# EAGLE board Charge (EAGLE 8.4.1)
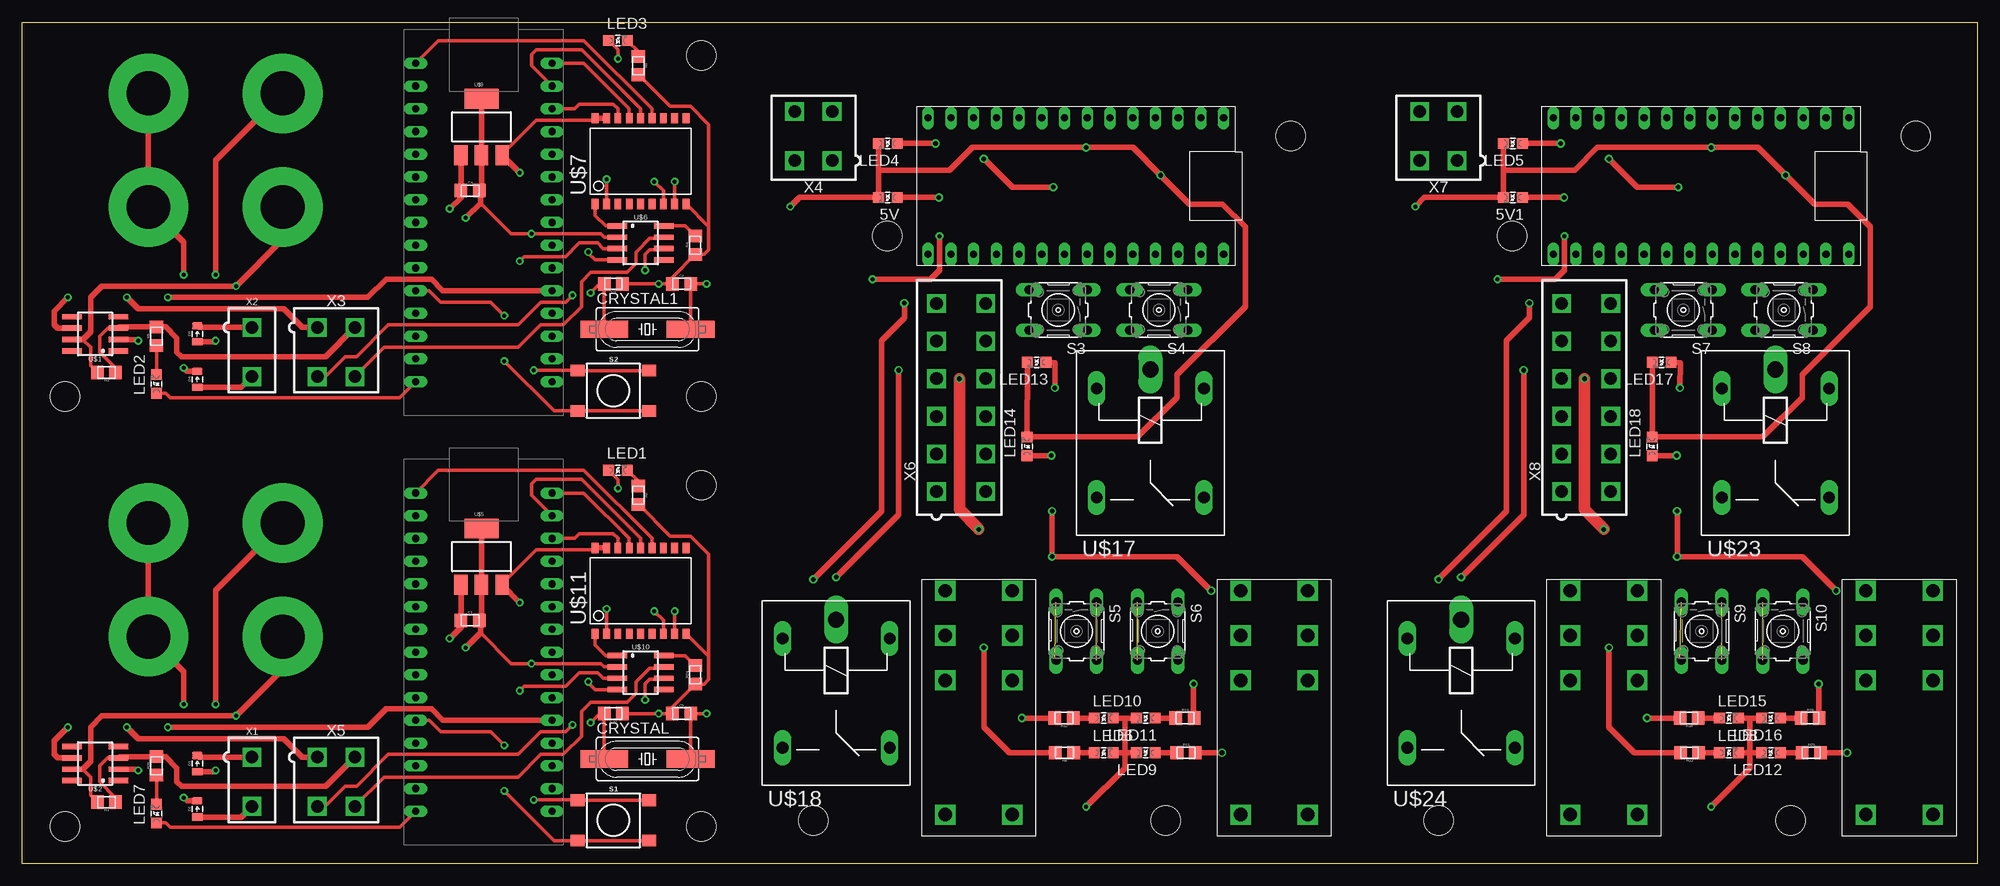
[diagram p0: board, top side]
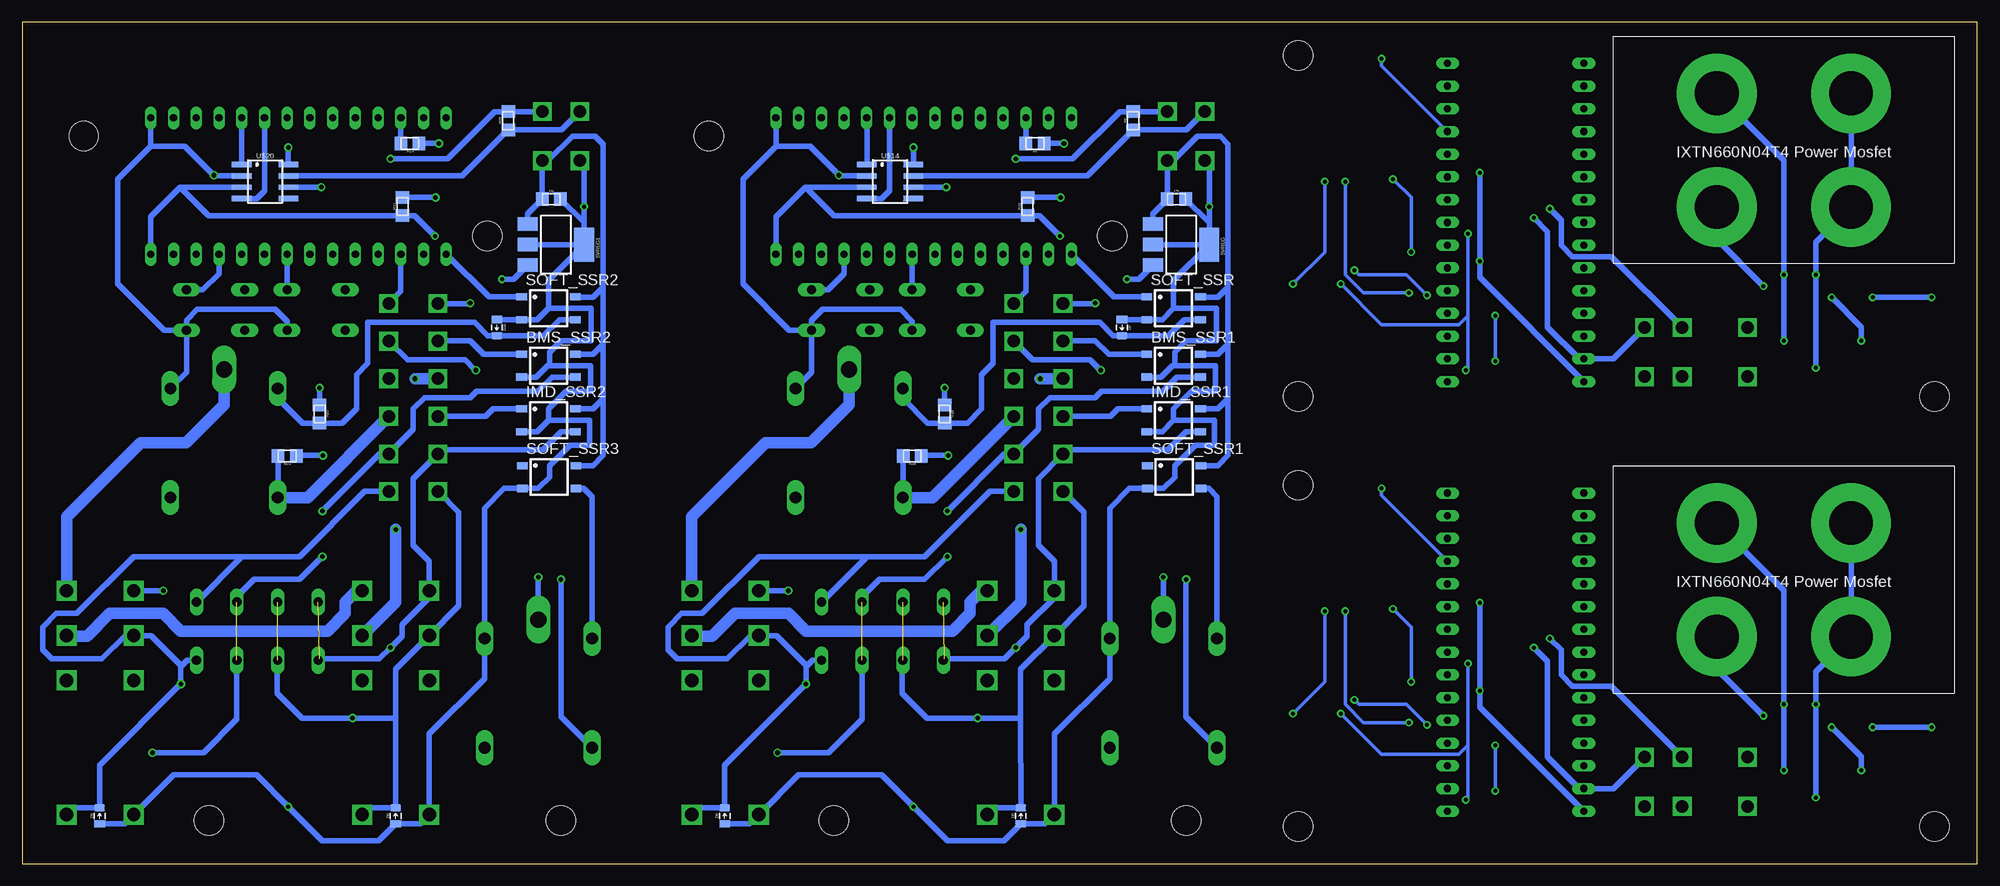
[diagram p1: board, bottom side, seen from below]

Size 218.44 x 93.98 mm. Coordinates in mm from the lower left corner, seen from the top.
Outline: 0,0 0,93.98 218.44,93.98 218.44,0 0,0
Copper layers (1*16): Top 0.035mm / dielectric 1.5mm / Bottom 0.035mm
Design rules "DRC Advanced Circuits": minimum track width 6mil, minimum drill 15mil, track to track 6mil, track to pad 6mil, pad to pad 6mil, via to via 6mil, smd to smd 6mil, copper to edge 40mil, drill to drill 6mil, minimum pad ring 10mil, minimum via ring 8mil, stop-mask expansion 4mil, vias tented up to drill 0mil, thermal gap 10mil
Holes 3.3 mm at 75.9,42.27 75.9,4.17 4.78,4.17 75.9,90.27 75.9,52.17 4.78,52.17 88.39,4.83 141.73,81.28 127.76,4.83 96.65,70.1 158.24,4.83 211.58,81.28 197.61,4.83 166.5,70.1

## Footprints (pad centres in the part's own frame; a part is rotated, then mirrored left to right if it is on the bottom)
LED-805 = smd 1.2 x 1.2: A 0,-1.05; C 0,1.05
SOT223 = smd 1.5 x 2.235: 1 -2.3,-3.15; 2 0,-3.15; 3 2.3,-3.15 | smd 3.8 x 2.2: 4 0,3.15
SOP04 = smd 0.8 x 1.2: 1 -1.27,-3; 2 1.27,-3; 3 1.27,3; 4 -1.27,3
0805 = smd 1.4 x 1.5: 1 -1.025,0; 2 1.025,0
HC49UP = smd 5.334 x 1.93: 1 -4.826,0; 2 4.826,0
0805_D = smd 0.8 x 1.2: A -0.9,0; C 0.9,0
TACTILE_SWITCH_SMD_6.2MM_TALL = smd 1.55 x 1.3: A1 -3.975,-2.25; A2 3.975,-2.25; B1 -3.975,2.25; B2 3.975,2.25
B3F-10XX = drill 1.016 long: 1 -3.251,2.261; 2 3.251,2.261; 3 -3.251,-2.261; 4 3.251,-2.261
SOIC-08 = smd 0.6 x 2.2: 1 -1.905,-2.6; 2 -0.635,-2.6; 3 0.635,-2.6; 4 1.905,-2.6; 5 1.905,2.6; 6 0.635,2.6; 7 -0.635,2.6; 8 -1.905,2.6
SOT-227B = drill 4.9 pad 8.89: P$1 11.55,19; P$2 26.55,19; P$3 26.55,6.3; P$4 11.55,6.3
ARDUINO_NANO = drill 0.8 long: 3.3V 1.27,36.83; 5V 1.27,11.43; A0 1.27,31.75; A1 1.27,29.21; A2 1.27,26.67; A3 1.27,24.13; A4 1.27,21.59; A5 1.27,19.05; A6 1.27,16.51; A7 1.27,13.97; AREF 1.27,34.29; D0(RX) 16.51,6.35; D1(TX) 16.51,3.81; D2 16.51,13.97; D3 16.51,16.51; D4 16.51,19.05; D5 16.51,21.59; D6 16.51,24.13; D7 16.51,26.67; D8 16.51,29.21; D9 16.51,31.75; D10 16.51,34.29; D11 16.51,36.83; D12 16.51,39.37; D13 1.27,39.37; GND 1.27,6.35; GND1 16.51,11.43; RST 1.27,8.89; RST1 16.51,8.89; VIN 1.27,3.81
SOIC-18W = smd 0.762 x 1.143: 1 -5.08,-4.788; 2 -3.81,-4.788; 3 -2.54,-4.788; 4 -1.27,-4.788; 5 0,-4.788; 6 1.27,-4.788; 7 2.54,-4.788; 8 3.81,-4.788; 9 5.08,-4.788; 10 5.08,4.788; 11 3.81,4.788; 12 2.54,4.788; 13 1.27,4.788; 14 0,4.788; 15 -1.27,4.788; 16 -2.54,4.788; 17 -3.81,4.788; 18 -5.08,4.788
TEENSY_3.2_SIMPLE = drill 0.8 long: 3.3V 16.51,29.21; A0 16.51,3.81; A1 16.51,6.35; A2 16.51,8.89; A3 16.51,11.43; A4 16.51,13.97; A5 16.51,16.51; A6 16.51,19.05; A7 16.51,21.59; A8 16.51,24.13; A9 16.51,26.67; AGND 16.51,31.75; D0(RX1) 1.27,31.75; D1(TX1) 1.27,29.21; D2 1.27,26.67; D3(CANTX) 1.27,24.13; D4(CANRX) 1.27,21.59; D5 1.27,19.05; D6 1.27,16.51; D7(RX3) 1.27,13.97; D8(TX3) 1.27,11.43; D9(RX2) 1.27,8.89; D10(TX2) 1.27,6.35; D11 1.27,3.81; D12 1.27,1.27; D13 16.51,1.27; GND 1.27,34.29; VIN 16.51,34.29
G2RL-2 = drill 1.5 square: 2 10.008,0; 3 5.004,0; 4 0,0; 5 0,7.493; 6 5.004,7.493; 7 10.008,7.493; COIL+ 25.019,0; COIL- 25.019,7.493
ZF112 = drill 1.321 long: 1 4.064,14.884; 2 4.064,2.896; O 16.256,14.884; S 16.256,2.896 | drill 1.803 long: P 1.956,8.89
MINIFIT_5566-2 = drill 1.4 square: 1 0,-2.75; 2 0,2.75
MINIFIT_5566-4 = drill 1.4 square: 1 2.1,-2.75; 2 -2.1,-2.75; 3 2.1,2.75; 4 -2.1,2.75
MINIFIT_5566-12 = drill 1.4 square: 1 10.5,-2.75; 2 6.3,-2.75; 3 2.1,-2.75; 4 -2.1,-2.75; 5 -6.3,-2.75; 6 -10.5,-2.75; 7 10.5,2.75; 8 6.3,2.75; 9 2.1,2.75; 10 -2.1,2.75; 11 -6.3,2.75; 12 -10.5,2.75

## Placement (x,y rotation side)
5V  [LED-805]  96.71,74.42 90 top
5V1  [LED-805]  166.56,74.42 90 top
5VREG  [SOT223]  88.96,69.15 270 bottom
5VREG1  [SOT223]  158.81,69.15 270 bottom
BMS_SSR1  CPC1002N  [SOP04]  89.79,55.63 270 bottom
BMS_SSR2  CPC1002N  [SOP04]  159.64,55.63 270 bottom
C1  .22uF  [0805]  50.04,27.18 0 top
C2  22pF  [0805]  73.66,64.77 0 top
C3  22pF  [0805]  66.04,64.77 180 top
C4  .22uF  [0805]  50.04,75.18 0 top
C5  .22uF  [0805]  89.47,74.23 0 bottom
C6  .22uF  [0805]  159.32,74.23 0 bottom
C9  22pF  [0805]  73.66,16.76 0 top
C10  22pF  [0805]  66.04,16.76 180 top
CRYSTAL  16MHz  [HC49UP]  69.85,11.68 0 top
CRYSTAL1  16MHz  [HC49UP]  69.85,59.69 0 top
D1  DIODE0805  [0805_D]  19.56,11.18 90 top
D2  DIODE0805  [0805_D]  19.56,6.1 90 top
D3  DIODE0805  [0805_D]  19.56,59.18 90 top
D4  DIODE0805  [0805_D]  19.56,54.1 90 top
D5  DIODE0805  [0805_D]  106.87,5.33 90 bottom
D6  DIODE0805  [0805_D]  139.95,5.33 90 bottom
D7  DIODE0805  [0805_D]  95.57,59.88 270 bottom
D8  DIODE0805  [0805_D]  176.72,5.33 90 bottom
D9  DIODE0805  [0805_D]  209.8,5.33 90 bottom
D10  DIODE0805  [0805_D]  165.42,59.88 270 bottom
IMD_SSR1  CPC1002N  [SOP04]  89.79,49.53 270 bottom
IMD_SSR2  CPC1002N  [SOP04]  159.64,49.53 270 bottom
LED1  GREEN  [LED-805]  66.55,43.94 270 top
LED2  PURPLE  [LED-805]  14.99,53.59 0 top
LED3  GREEN  [LED-805]  66.55,91.95 270 top
LED4  [LED-805]  96.71,80.45 90 top
LED5  [LED-805]  166.56,80.45 90 top
LED6  [LED-805]  120.84,12.38 270 top
LED7  PURPLE  [LED-805]  14.99,5.59 0 top
LED8  [LED-805]  190.69,12.38 270 top
LED9  [LED-805]  125.54,12.38 90 top
LED10  [LED-805]  120.84,16.26 270 top
LED11  [LED-805]  125.54,16.26 90 top
LED12  [LED-805]  195.39,12.38 90 top
LED13  [LED-805]  113.35,56.01 90 top
LED14  [LED-805]  112.27,46.61 0 top
LED15  [LED-805]  190.69,16.26 270 top
LED16  [LED-805]  195.39,16.26 90 top
LED17  [LED-805]  183.2,56.01 90 top
LED18  [LED-805]  182.12,46.61 0 top
R1  10k  [0805]  9.4,6.86 180 top
R2  200  [0805]  68.83,41.15 270 top
R3  10k  [0805]  9.4,54.86 180 top
R4  4.7k  [0805]  75.18,69.09 90 top
R5  200  [0805]  14.99,58.93 90 top
R6  200  [0805]  68.83,89.15 270 top
R7  [0805]  105.28,80.45 180 bottom
R8  [0805]  116.46,12.38 180 top
R9  120  [0805]  94.3,82.99 90 bottom
R10  [0805]  106.11,73.41 90 bottom
R11  [0805]  130.05,12.38 0 top
R12  [0805]  116.4,16.26 180 top
R13  [0805]  129.92,16.26 0 top
R14  [0805]  175.13,80.45 180 bottom
R15  [0805]  115.38,50.23 270 bottom
R16  [0805]  119,45.53 180 bottom
R17  [0805]  175.96,73.41 90 bottom
R18  [0805]  186.25,16.26 180 top
R19  [0805]  199.77,16.26 0 top
R20  [0805]  185.23,50.23 270 bottom
R21  [0805]  188.85,45.53 180 bottom
R22  [0805]  186.31,12.38 180 top
R23  [0805]  199.9,12.38 0 top
R24  4.7k  [0805]  75.18,21.08 90 top
R25  120  [0805]  164.15,82.99 90 bottom
R28  200  [0805]  14.99,10.92 90 top
S1  [TACTILE_SWITCH_SMD_6.2MM_TALL]  66.04,4.83 0 top
S2  [TACTILE_SWITCH_SMD_6.2MM_TALL]  66.04,52.83 0 top
S3  [B3F-10XX]  115.76,61.85 180 top
S4  [B3F-10XX]  127,61.85 180 top
S5  [B3F-10XX]  117.79,25.97 270 top
S6  [B3F-10XX]  126.87,25.97 270 top
S7  [B3F-10XX]  185.61,61.85 180 top
S8  [B3F-10XX]  196.85,61.85 180 top
S9  [B3F-10XX]  187.64,25.97 270 top
S10  [B3F-10XX]  196.72,25.97 270 top
SOFT_SSR  CPC1002N  [SOP04]  89.79,62.04 270 bottom
SOFT_SSR1  CPC1002N  [SOP04]  89.73,43.18 270 bottom
SOFT_SSR2  CPC1002N  [SOP04]  159.64,62.04 270 bottom
SOFT_SSR3  CPC1002N  [SOP04]  159.58,43.18 270 bottom
U$1  MC34152  [SOIC-08]  8.13,59.18 90 top
U$2  MC34152  [SOIC-08]  8.13,11.18 90 top
U$3  IXTN660N04T4  [SOT-227B]  40.64,19.05 0 bottom
U$4  ARDUINO_NANO  [ARDUINO_NANO]  42.67,2.03 0 top
U$5  [SOT223]  51.31,34.29 0 top
U$6  MCP2551  [SOIC-08]  69.09,69.34 270 top
U$7  MCP2515SMD  [SOIC-18W]  69.09,78.49 0 top
U$8  ARDUINO_NANO  [ARDUINO_NANO]  42.67,50.04 0 top
U$9  [SOT223]  51.31,82.3 0 top
U$10  MCP2551  [SOIC-08]  69.09,21.34 270 top
U$11  MCP2515SMD  [SOIC-18W]  69.09,30.48 0 top
U$12  IXTN660N04T4  [SOT-227B]  40.64,67.06 0 bottom
U$13  TEENSY_3.2_SIMPLE  [TEENSY_3.2_SIMPLE]  99.95,84.58 270 top
U$14  MCP2551  [SOIC-08]  121.48,76.2 270 bottom
U$15  G2RL-2-DC12  [G2RL-2]  103.12,30.48 270 top
U$16  G2RL-2-DC12  [G2RL-2]  136.14,30.48 270 top
U$17  G5LE  [ZF112]  117.16,57.15 270 top
U$18  G5LE  [ZF112]  82.04,29.21 270 top
U$19  TEENSY_3.2_SIMPLE  [TEENSY_3.2_SIMPLE]  169.8,84.58 270 top
U$20  MCP2551  [SOIC-08]  191.33,76.2 270 bottom
U$21  G2RL-2-DC12  [G2RL-2]  172.97,30.48 270 top
U$22  G2RL-2-DC12  [G2RL-2]  205.99,30.48 270 top
U$23  G5LE  [ZF112]  187.01,57.15 270 top
U$24  G5LE  [ZF112]  151.89,29.21 270 top
X1  CONNECTOR-2  [MINIFIT_5566-2]  25.65,9.14 180 top
X2  CONNECTOR-2  [MINIFIT_5566-2]  25.65,57.15 180 top
X3  MINIFIT_5566-4  [MINIFIT_5566-4]  35.05,57.15 180 top
X4  CONNECTOR-4  [MINIFIT_5566-4]  88.39,81.28 0 top
X5  MINIFIT_5566-4  [MINIFIT_5566-4]  35.05,9.14 180 top
X6  CONNECTOR-12  [MINIFIT_5566-12]  104.9,52.07 270 top
X7  CONNECTOR-4  [MINIFIT_5566-4]  158.24,81.28 0 top
X8  CONNECTOR-12  [MINIFIT_5566-12]  174.75,52.07 270 top

## Library data of the parts
5V 5V1 5VREG 5VREG1 BMS_SSR1 BMS_SSR2 C1-C6 C9 C10 D1-D10 IMD_SSR1 IMD_SSR2 LED1-LED18 R1-R25 R28 S1 S2 SOFT_SSR SOFT_SSR1-SOFT_SSR3 U$1-U$24 = HyTechDevices
CRYSTAL CRYSTAL1 = SparkFun-FreqCtrl
S3-S10 = HyTechDevices; MPN: B3F-1000; OC_FARNELL: 176432; OC_NEWARK: 36M3542
X1 X2 = HyTechDevices; OC_FARNELL: 1822072; OC_NEWARK: unknown
X3-X8 = HyTechDevices; OC_FARNELL: unknown; OC_NEWARK: unknown

## Nets
+5V: LED7.A U$4.VIN U$5.3 U$10.3 U$11.17 U$11.18
+5V1: LED2.A U$6.3 U$7.17 U$7.18 U$8.VIN U$9.3
+5V2: 5VREG.3 R10.1 U$13.VIN U$14.3
+5V3: 5VREG1.3 R17.1 U$19.VIN U$20.3
+12V: C1.1 U$2.6 U$5.1 X5.1
+12V1: C4.1 U$1.6 U$9.1 X3.1
+12V2: 5VREG.1 BMS_SSR1.4 C5.1 IMD_SSR1.4 SOFT_SSR1.4 SOFT_SSR.4 X4.1
+12V3: 5VREG1.1 BMS_SSR2.4 C6.1 IMD_SSR2.4 SOFT_SSR2.4 SOFT_SSR3.4 X7.1
BMS: BMS_SSR1.1 X6.5
BMS1: BMS_SSR2.1 X8.5
BMS_12V: BMS_SSR1.3 R11.2 S6.3 S6.4 U$16.4 X6.8
BMS_12V1: BMS_SSR2.3 R23.2 S10.3 S10.4 U$22.4 X8.8
BMS_INRLK: SOFT_SSR1.1
BMS_INRLK1: SOFT_SSR3.1
BMS_OK: D6.C R13.2 S6.1 S6.2 U$16.3 U$16.COIL- X6.7
BMS_OK1: D9.C R19.2 S10.1 S10.2 U$22.3 U$22.COIL- X8.7
BTN_X: S4.3 U$13.A9
BTN_X1: S8.3 U$19.A9
BTN_Y: S3.3 U$13.A6
BTN_Y1: S7.3 U$19.A6
CANH: U$10.7 X5.4
CANH1: U$6.7 X3.4
CANH2: R9.1 U$14.7 X4.4
CANH3: R25.1 U$20.7 X7.4
CANL: U$10.6 X5.3
CANL1: U$6.6 X3.3
CANL2: R9.2 U$14.6 X4.3
CANL3: R25.2 U$20.6 X7.3
CANRX: U$13.D4(CANRX) U$14.4
CANRX1: U$19.D4(CANRX) U$20.4
CANTX: U$13.D3(CANTX) U$14.1
CANTX1: U$19.D3(CANTX) U$20.1
CS: U$4.D10 U$11.16
CS1: U$7.16 U$8.D10
GND: C1.2 C9.1 C10.1 R1.1 R2.2 R24.1 R28.2 S1.B1 S1.B2 U$2.3 U$4.GND U$5.2 U$5.4 U$10.2 U$11.9 X5.2
GND1: C2.1 C3.1 C4.2 R3.1 R4.1 R5.2 R6.2 S2.B1 S2.B2 U$1.3 U$6.2 U$7.9 U$8.GND U$9.2 U$9.4 X3.2
GND2: 5V.C 5VREG.2 5VREG.4 BMS_SSR1.2 C5.2 D5.A D6.A D7.A IMD_SSR1.2 LED4.C LED6.C LED9.C LED10.C LED11.C LED13.C LED14.C S3.1 S4.1 SOFT_SSR1.2 SOFT_SSR.2 U$13.GND U$14.2 U$14.8 U$15.COIL+ U$16.COIL+ U$17.1 U$18.1 X4.2
GND3: 5V1.C 5VREG1.2 5VREG1.4 BMS_SSR2.2 C6.2 D8.A D9.A D10.A IMD_SSR2.2 LED5.C LED8.C LED12.C LED15.C LED16.C LED17.C LED18.C S7.1 S8.1 SOFT_SSR2.2 SOFT_SSR3.2 U$19.GND U$20.2 U$20.8 U$21.COIL+ U$22.COIL+ U$23.1 U$24.1 X7.2
GPIO: U$13.A1 X6.12
GPIO1: U$19.A1 X8.12
IMD: IMD_SSR1.1 X6.3
IMD1: IMD_SSR2.1 X8.3
IMD_12V: IMD_SSR1.3 R8.2 S5.3 S5.4 U$15.4 X6.2
IMD_12V1: IMD_SSR2.3 R22.2 S9.3 S9.4 U$21.4 X8.2
IMD_OK: D5.C R12.2 S5.1 S5.2 U$15.3 U$15.COIL- X6.1
IMD_OK1: D8.C R18.2 S9.1 S9.2 U$21.3 U$21.COIL- X8.1
INT: U$11.12
INT1: U$7.12
MISO: U$4.D12 U$11.15
MISO1: U$7.15 U$8.D12
MOSI: U$4.D11 U$11.14
MOSI1: U$7.14 U$8.D11
N$1: D1.C X1.1
N$2: D1.A U$3.P$1
N$3: R1.2 U$2.7 U$3.P$4
N$4: U$2.2 U$4.D2
N$5: D2.C U$3.P$2 U$3.P$3
N$6: LED1.A U$4.D9
N$7: D2.A X1.2
N$8: LED1.C R2.1
N$9: S1.A1 S1.A2 U$4.A7
N$10: R3.2 U$1.7 U$12.P$4
N$11: D3.A U$12.P$1
N$12: U$1.2 U$8.D2
N$13: D3.C X2.1
N$14: D4.C U$12.P$2 U$12.P$3
N$15: U$6.1 U$7.1
N$16: U$6.4 U$7.2
N$17: C2.2 CRYSTAL1.2 U$7.8
N$18: R4.2 U$6.8
N$19: C3.2 CRYSTAL1.1 U$7.7
N$20: LED2.C R5.1
N$21: D4.A X2.2
N$22: LED3.C R6.1
N$23: LED3.A U$8.D9
N$24: S2.A1 S2.A2 U$8.A7
N$25: LED6.A R8.1
N$26: LED10.A R12.1
N$27: LED11.A R13.1
N$28: LED13.A R15.1
N$29: LED14.A R16.1
N$30: LED9.A R11.1
N$31: SOFT_SSR1.3 U$18.2
N$32: LED4.A R7.1
N$33: R7.2 U$13.D10(TX2)
N$34: 5V.A R10.2
N$35: U$18.P X6.11
N$36: U$18.S X6.6
N$37: U$10.1 U$11.1
N$38: LED8.A R22.1
N$39: U$10.4 U$11.2
N$40: C9.2 CRYSTAL.2 U$11.8
N$41: R24.2 U$10.8
N$42: C10.2 CRYSTAL.1 U$11.7
N$43: LED15.A R18.1
N$44: LED16.A R19.1
N$45: LED17.A R20.1
N$46: LED18.A R21.1
N$47: LED12.A R23.1
N$48: SOFT_SSR3.3 U$24.2
N$49: LED5.A R14.1
N$50: R14.2 U$19.D10(TX2)
N$51: 5V1.A R17.2
N$52: U$24.P X8.11
N$53: U$24.S X8.6
N$61: LED7.C R28.1
SCK: U$4.D13 U$11.13
SCK1: U$7.13 U$8.D13
SHUTDOWN_IN: U$15.6 X6.4
SHUTDOWN_IN1: U$21.6 X8.4
SHUTDOWN_IN_A: U$15.5 U$16.6
SHUTDOWN_IN_A1: U$21.5 U$22.6
SHUTDOWN_IN_B: U$16.5 U$17.P
SHUTDOWN_IN_B1: U$22.5 U$23.P
SHUTDOWN_OUT: R16.2 U$17.S X6.9
SHUTDOWN_OUT1: R21.2 U$23.S X8.9
SW_KILL: SOFT_SSR.1 U$13.D13
SW_KILL1: SOFT_SSR2.1 U$19.D13
SW_KILL_RELAY: D7.C R15.2 SOFT_SSR.3 U$17.2
SW_KILL_RELAY1: D10.C R20.2 SOFT_SSR2.3 U$23.2

## Tracks (layer width: path | path; a pad name or v marks a point on that pad's centre or on a via)
+5V  (via drill 0.45)
  Top 0.406: LED7.A 16.04,4.54 16.51,4.06 42.16,4.06 U$4.VIN | U$11.18 63.79,35.05 57.4,35.05 53.61,31.26 U$5.3 | U$10.3 64.9,20.7 64.26,21.34 62.23,21.34 60.71,19.81 56.09,19.81 v55.58,19.3
  Top 0.61: U$5.3 v55.58,29.17 | U$11.17 U$11.18
  Bottom 0.61: v55.58,29.17 v55.58,19.3 55.58,17.48 U$4.VIN
+5V1  (via drill 0.45)
  Top 0.406: LED2.A 16.04,52.54 16.51,52.07 42.16,52.07 U$8.VIN | U$7.18 63.79,83.06 57.4,83.06 53.61,79.26 U$9.3 | U$6.3 64.9,68.71 64.26,69.34 62.23,69.34 60.71,67.82 56.09,67.82 v55.58,67.31
  Top 0.61: U$9.3 v55.58,77.17 | U$7.17 U$7.18
  Bottom 0.61: v55.58,77.17 v55.58,67.31 55.58,65.49 U$8.VIN
+5V2  (via drill 0.45)
  Top 0.61: v95,65.28 101.47,65.28 102.49,66.29 v102.49,70.1
  Bottom 0.61: 130.94,75.56 U$14.3 | U$13.VIN 134.24,72.26 130.94,75.56 | 130.94,75.56 127.75,72.38 R10.1 104.78,72.39 v102.49,70.1 | 5VREG.3 93.69,65.28 v95,65.28
+5V3  (via drill 0.45)
  Top 0.61: v164.85,65.28 171.32,65.28 172.34,66.29 v172.34,70.1
  Bottom 0.61: 200.79,75.56 U$20.3 | U$19.VIN 204.09,72.26 200.79,75.56 | 200.79,75.56 197.6,72.38 R17.1 174.62,72.39 v172.34,70.1 | 5VREG1.3 163.54,65.28 v164.85,65.28
+12V  (via drill 0.45)
  Top 0.61: X5.1 31.29,11.89 29.21,13.97 12.95,13.97 v11.68,15.24 | v5.08,15.24 3.56,13.72 3.56,12.19 3.94,11.81 U$2.6 | U$5.1 C1.1 49.01,26.41 v47.75,25.15
  Bottom 0.61: v11.68,15.24 v5.08,15.24 | X5.1 40.87,19.81 45.21,19.81 46.48,21.08 46.48,23.88 v47.75,25.15
+12V1  (via drill 0.45)
  Top 0.61: X3.1 31.29,59.9 29.21,61.98 12.95,61.98 v11.68,63.25 | v5.08,63.25 3.56,61.72 3.56,60.2 3.94,59.82 U$1.6 | U$9.1 C4.1 49.01,74.41 v47.75,73.15
  Bottom 0.61: v11.68,63.25 v5.08,63.25 | X3.1 40.87,67.82 45.21,67.82 46.48,69.09 46.48,71.88 v47.75,73.15
+12V2
  Bottom 0.61: SOFT_SSR.4 86.74,63.26 84.84,63.26 83.69,64.4 | 5VREG.1 92.11,72.61 C5.1 X4.1 89.87,78.53 87.12,81.28 84.58,81.28 83.69,80.39 83.69,64.4 | 83.69,64.4 83.69,58.04 | 83.69,58.04 84.84,56.9 BMS_SSR1.4 | 83.69,58.04 83.69,51.94 | 83.69,51.94 84.84,50.8 IMD_SSR1.4 | 83.69,51.94 83.69,45.59 84.84,44.45 SOFT_SSR1.4
+12V3
  Bottom 0.61: SOFT_SSR2.4 156.59,63.26 154.69,63.26 153.54,64.4 | 5VREG1.1 161.96,72.61 C6.1 X7.1 159.72,78.53 156.97,81.28 154.43,81.28 153.54,80.39 153.54,64.4 | 153.54,64.4 153.54,58.04 | 153.54,58.04 154.69,56.9 BMS_SSR2.4 | 153.54,58.04 153.54,51.94 | 153.54,51.94 154.69,50.8 IMD_SSR2.4 | 153.54,51.94 153.54,45.59 154.69,44.45 SOFT_SSR3.4
BMS
  Bottom 0.61: BMS_SSR1.1 97.03,56.9 98.55,58.42 102.1,58.42 X6.5
BMS1
  Bottom 0.61: BMS_SSR2.1 166.88,56.9 168.4,58.42 171.95,58.42 X8.5
BMS_12V  (via drill 0.51)  (1 unrouted)
  Top 0.61: v134.05,12.38 R11.2 | v115.06,39.37 v115.06,34.29 129.03,34.29 v132.84,30.48
  Bottom 0.61: BMS_SSR1.3 89.41,54.36 91,52.77 97.85,52.77 98.55,52.07 103.63,52.07 104.9,50.8 104.9,48.52 X6.8 108.66,45.77 v115.06,39.37 | S6.4 124.61,16.1 128.33,12.38 v134.05,12.38 | S6.3 124.61,29.82 122.68,31.75 117.6,31.75 v115.06,34.29 | U$16.4 v132.84,30.48
BMS_12V1  (via drill 0.51)  (1 unrouted)
  Top 0.61: v203.9,12.38 R23.2 | v184.91,39.37 v184.91,34.29 198.88,34.29 v202.69,30.48
  Bottom 0.61: BMS_SSR2.3 159.26,54.36 160.84,52.77 167.7,52.77 168.4,52.07 173.48,52.07 174.75,50.8 174.75,48.52 X8.8 178.51,45.77 v184.91,39.37 | S10.4 194.46,16.1 198.18,12.38 v203.9,12.38 | S10.3 194.46,29.82 192.53,31.75 187.45,31.75 v184.91,34.29 | U$22.4 v202.69,30.48
BMS_OK  (via drill 0.51)
  Top 0.61: v130.87,20.07 130.87,16.26 R13.2
  Bottom 0.61: U$16.COIL- 142.86,6.23 D6.C 139.95,10.99 v130.87,20.07 130.87,21.99 | 130.87,21.99 130.87,22.16 134.19,25.48 U$16.3 137.08,25.48 139.7,22.86 145.29,22.86 146.3,23.88 146.3,26.42 144.78,27.94 142.49,27.94 136.14,34.29 124.07,34.29 | S6.2 130.14,22.72 130.87,21.99 | X6.7 110.32,41.57 117.6,34.29 124.07,34.29 | 124.07,34.29 S6.1 129.13,29.31
BMS_OK1  (via drill 0.51)
  Top 0.61: v200.72,20.07 200.72,16.26 R19.2
  Bottom 0.61: U$22.COIL- 212.71,6.23 D9.C 209.8,10.99 v200.72,20.07 200.72,21.99 | 200.72,21.99 200.72,22.16 204.04,25.48 U$22.3 206.93,25.48 209.55,22.86 215.14,22.86 216.15,23.88 216.15,26.42 214.63,27.94 212.34,27.94 205.99,34.29 193.92,34.29 | S10.2 199.99,22.72 200.72,21.99 | X8.7 180.17,41.57 187.45,34.29 193.92,34.29 | 193.92,34.29 S10.1 198.98,29.31
BTN_X
  Bottom 0.61: U$13.A9 126.62,65.91 128.42,64.11 S4.3
BTN_X1
  Bottom 0.61: U$19.A9 196.47,65.91 198.27,64.11 S8.3
BTN_Y
  Bottom 0.61: U$13.A6 119.01,68.06 S3.3
BTN_Y1
  Bottom 0.61: U$19.A6 188.86,68.06 S7.3
CANH
  Top 0.406: X5.4 40.41,9.65 55.37,9.65 57.91,12.19 60.45,12.19 62.48,14.22 62.48,17.02 63.5,18.03 67.56,18.03 68.58,19.05 68.58,20.32 70.1,21.84 71.56,21.84 U$10.7
CANH1
  Top 0.406: X3.4 40.41,57.66 55.37,57.66 57.91,60.2 60.45,60.2 62.48,62.23 62.48,65.02 63.5,66.04 67.56,66.04 68.58,67.06 68.58,68.33 70.1,69.85 71.56,69.85 U$6.7
CANH2
  Bottom 0.61: X4.4 88.35,81.97 R9.1 99.43,76.83 U$14.7
CANH3
  Bottom 0.61: X7.4 158.2,81.97 R25.1 169.28,76.83 U$20.7
CANL  (via drill 0.45)
  Top 0.406: X5.3 33.83,6.39 36.07,8.64 37.34,8.64 40.89,12.19 55.37,12.19 57.91,14.73 60.71,14.73 v61.47,15.49 | U$10.6 71.56,20.57 70.1,20.57 69.6,20.07 v69.6,18.29
  Bottom 0.406: v69.6,18.29 69.09,17.78 63.75,17.78 v61.47,15.49
CANL1  (via drill 0.45)
  Top 0.406: X3.3 33.83,54.4 36.07,56.64 37.34,56.64 40.89,60.2 55.37,60.2 57.91,62.74 60.71,62.74 v61.47,63.5 | U$6.6 71.56,68.58 70.1,68.58 69.6,68.07 v69.6,66.29
  Bottom 0.406: v69.6,66.29 69.09,65.79 63.75,65.79 v61.47,63.5
CANL2  (via drill 0.51)
  Top 0.61: v115.19,75.56 110.62,75.56 v107.44,78.74
  Bottom 0.61: X4.3 90.5,84.02 R9.2 95.81,84.02 101.09,78.74 v107.44,78.74 | U$14.6 v115.19,75.56
CANL3  (via drill 0.51)
  Top 0.61: v185.04,75.56 180.47,75.56 v177.29,78.74
  Bottom 0.61: X7.3 160.35,84.02 R25.2 165.66,84.02 170.94,78.74 v177.29,78.74 | U$20.6 v185.04,75.56
CANRX
  Bottom 0.61: U$13.D4(CANRX) 121.54,75.18 122.43,74.3 U$14.4
CANRX1
  Bottom 0.61: U$19.D4(CANRX) 191.39,75.18 192.28,74.3 U$20.4
CANTX
  Bottom 0.61: U$14.1 U$13.D3(CANTX)
CANTX1
  Bottom 0.61: U$20.1 U$19.D3(CANTX)
CS
  Top 0.406: U$11.16 66.55,36.32 66.04,36.83 62.23,36.83 61.72,36.32 U$4.D10
CS1
  Top 0.406: U$7.16 66.55,84.33 66.04,84.84 62.23,84.84 61.72,84.33 U$8.D10
GND  (via drill 0.45)
  Top 0.406: U$2.3 9.53,11.81 8.64,10.92 8.64,9.14 10.35,7.43 10.35,6.88 R1.1 | C10.1 v71.12,16.76 C9.1 72.64,17.51 R24.1 76.19,20.06 76.71,20.57 76.71,23.15 | 51.19,25.79 54.62,22.35 v56.9,22.35 64.64,22.35 65.02,21.97 U$10.2 | U$11.9 76.71,23.15 | R2.2 72.38,36.58 74.68,36.58 76.71,34.54 76.71,23.15 | v57.15,7.11 62.03,7.11 S1.B1 S1.B2
  Top 0.61: U$2.3 10.86,11.95 R28.2 15.99,11.95 17.27,10.67 17.27,9.14 17.78,8.64 33.89,8.64 X5.2 | U$5.4 U$5.2 51.31,27.42 51.19,27.3 | 51.19,27.3 C1.2 | 51.19,27.3 51.19,25.79 v49.53,24.13
  Bottom 0.406: v71.12,16.76 66.55,12.19 57.91,12.19 56.9,13.21 | 56.9,13.21 v56.9,22.35 | v57.15,7.11 56.9,7.37 56.9,13.21
  Bottom 0.61: X5.2 40.66,8.38 U$4.GND 44.45,8.38 48.01,11.94 48.01,22.61 v49.53,24.13
GND1  (via drill 0.45)
  Top 0.406: U$1.3 9.53,59.82 8.64,58.93 8.64,57.15 10.35,55.44 10.35,54.89 R3.1 | C3.1 v71.12,64.77 C2.1 72.64,65.51 R4.1 76.19,68.06 76.71,68.58 76.71,71.16 | 51.19,73.79 54.62,70.36 v56.9,70.36 64.64,70.36 65.02,69.98 U$6.2 | U$7.9 76.71,71.16 | R6.2 72.38,84.58 74.68,84.58 76.71,82.55 76.71,71.16 | v57.15,55.12 62.03,55.12 S2.B1 S2.B2
  Top 0.61: U$1.3 10.86,59.95 R5.2 15.99,59.95 17.27,58.67 17.27,57.15 17.78,56.64 33.89,56.64 X3.2 | U$9.4 U$9.2 51.31,75.43 51.19,75.31 | 51.19,75.31 C4.2 | 51.19,75.31 51.19,73.79 v49.53,72.14
  Bottom 0.406: v71.12,64.77 66.55,60.2 57.91,60.2 56.9,61.21 | 56.9,61.21 v56.9,70.36 | v57.15,55.12 56.9,55.37 56.9,61.21
  Bottom 0.61: X3.2 40.66,56.39 U$8.GND 44.45,56.39 48.01,59.94 48.01,70.61 v49.53,72.14
GND2  (via drill 0.45, 0.51)
  Top 0.61: LED9.C 123.19,12.38 | LED10.C 123.19,16.26 | 123.19,16.26 LED11.C | 123.19,16.26 123.19,12.38 | LED6.C 123.19,12.38 | v127.19,76.9 124.08,80.01 v118.87,80.01 106.17,80.01 103.63,77.47 95.66,77.47 | v127.19,76.9 127.25,76.83 | LED4.C 95.66,77.47 | 95.66,77.47 5V.C 86.83,74.42 v85.81,73.41 | LED13.C LED14.C 124.62,47.66 129.03,52.07 129.03,54.61 136.65,62.23 136.65,71.12 134.11,73.66 130.43,73.66 v127.19,76.9 | 123.19,12.38 123.19,10.67 v118.87,6.35
  Bottom 0.61: D6.A 137.17,4.43 U$16.COIL+ 131.7,9.91 122.43,9.91 v118.87,6.35 115.06,2.54 108.76,2.54 D5.A 104.15,4.43 U$15.COIL+ 103.12,14.48 96.93,20.68 U$18.1 96.93,39.73 94.74,41.91 SOFT_SSR1.2 90.93,41.91 89.66,43.18 89.66,44.45 87.38,46.74 85.22,46.74 85.22,49.53 89.79,49.53 | 86.32,78.5 X4.2 85.81,78.05 v85.81,73.41 85.81,71.63 | 88.38,74.17 C5.2 85.84,71.63 85.81,71.63 | U$14.8 118.88,78.74 v118.87,80.01 | U$14.2 127.13,76.83 v127.19,76.9 130.43,80.14 134.24,80.14 | 89.66,55.63 85.09,55.63 85.09,52.77 87.82,52.77 89.79,50.8 89.79,49.53 | 89.79,49.53 91.06,48.26 IMD_SSR1.2 | 89.66,55.63 89.92,55.63 91.19,54.36 BMS_SSR1.2 | 89.66,55.63 89.66,57.15 88.39,58.42 85.03,58.42 85.03,62.04 89.79,62.04 | 89.79,62.04 91.06,60.77 SOFT_SSR.2 D7.A | S3.1 119.01,60.59 120.33,61.91 129.03,61.91 130.25,60.69 S4.1 | U$17.1 130.25,54.88 S4.1 | S4.1 132.74,59.59 137.92,64.77 137.92,76.45 134.24,80.14 | 134.24,80.14 U$13.GND | 5VREG.4 85.81,71.63 | 89.79,62.04 89.79,65.18 5VREG.4 | 5VREG.2 5VREG.4
GND3  (via drill 0.45, 0.51)
  Top 0.61: LED12.C 193.04,12.38 | LED15.C 193.04,16.26 | 193.04,16.26 LED16.C | 193.04,16.26 193.04,12.38 | LED8.C 193.04,12.38 | v197.04,76.9 193.93,80.01 v188.72,80.01 176.02,80.01 173.48,77.47 165.51,77.47 | v197.04,76.9 197.1,76.83 | LED5.C 165.51,77.47 | 165.51,77.47 5V1.C 156.68,74.42 v155.66,73.41 | LED17.C LED18.C 194.47,47.66 198.88,52.07 198.88,54.61 206.5,62.23 206.5,71.12 203.96,73.66 200.28,73.66 v197.04,76.9 | 193.04,12.38 193.04,10.67 v188.72,6.35
  Bottom 0.61: D9.A 207.02,4.43 U$22.COIL+ 201.55,9.91 192.28,9.91 v188.72,6.35 184.91,2.54 178.61,2.54 D8.A 174,4.43 U$21.COIL+ 172.97,14.48 166.78,20.68 U$24.1 166.78,39.73 164.59,41.91 SOFT_SSR3.2 160.78,41.91 159.51,43.18 159.51,44.45 157.23,46.74 155.07,46.74 155.07,49.53 159.64,49.53 | 156.17,78.5 X7.2 155.66,78.05 v155.66,73.41 155.66,71.63 | 158.23,74.17 C6.2 155.69,71.63 155.66,71.63 | U$20.8 188.73,78.74 v188.72,80.01 | U$20.2 196.98,76.83 v197.04,76.9 200.28,80.14 204.09,80.14 | 159.51,55.63 154.94,55.63 154.94,52.77 157.67,52.77 159.64,50.8 159.64,49.53 | 159.64,49.53 160.91,48.26 IMD_SSR2.2 | 159.51,55.63 159.77,55.63 161.04,54.36 BMS_SSR2.2 | 159.51,55.63 159.51,57.15 158.24,58.42 154.88,58.42 154.88,62.04 159.64,62.04 | 159.64,62.04 160.91,60.77 SOFT_SSR2.2 D10.A | S7.1 188.86,60.59 190.18,61.91 198.88,61.91 200.1,60.69 S8.1 | U$23.1 200.1,54.88 S8.1 | S8.1 202.59,59.59 207.77,64.77 207.77,76.45 204.09,80.14 | 204.09,80.14 U$19.GND | 5VREG1.4 155.66,71.63 | 159.64,62.04 159.64,65.18 5VREG1.4 | 5VREG1.2 5VREG1.4
GPIO
  Bottom 0.61: U$13.A1 106.3,63.92 X6.12
GPIO1
  Bottom 0.61: U$19.A1 176.15,63.92 X8.12
IMD
  Bottom 0.61: X6.3 96.84,49.97 96.01,50.8 IMD_SSR1.1
IMD1
  Bottom 0.61: X8.3 166.69,49.97 165.86,50.8 IMD_SSR2.1
IMD_12V  (via drill 0.51)  (1 unrouted)
  Top 0.61: R8.2 110.3,12.38 107.44,15.24 v107.44,24.13
  Bottom 0.61: IMD_SSR1.3 88.39,48.26 90.42,46.23 101.69,46.23 X6.2 104.9,43.02 104.9,35.56 103.12,33.78 U$15.4 103.12,29.72 106.17,26.67 106.17,25.4 v107.44,24.13 108.71,22.86 115.39,22.86 arc-90 S5.4
IMD_12V1  (via drill 0.51)  (1 unrouted)
  Top 0.61: R22.2 180.15,12.38 177.29,15.24 v177.29,24.13
  Bottom 0.61: IMD_SSR2.3 158.24,48.26 160.27,46.23 171.54,46.23 X8.2 174.75,43.02 174.75,35.56 172.97,33.78 U$21.4 172.97,29.72 176.02,26.67 176.02,25.4 v177.29,24.13 178.56,22.86 185.24,22.86 arc-90 S9.4
IMD_OK  (via drill 0.51)  (1 unrouted)
  Top 0.61: v111.7,16.26 R12.2
  Bottom 0.61: 106.88,16.26 D5.C 109.84,6.23 U$15.COIL- | 106.88,16.26 v111.7,16.26 117.35,16.26 120.14,19.05 120.14,22.63 S5.2 | 106.88,16.26 106.88,21.72 U$15.3 99.82,28.78 99.82,39.24 X6.1
IMD_OK1  (via drill 0.51)  (1 unrouted)
  Top 0.61: v181.55,16.26 R18.2
  Bottom 0.61: 176.73,16.26 D8.C 179.69,6.23 U$21.COIL- | 176.73,16.26 v181.55,16.26 187.2,16.26 189.99,19.05 189.99,22.63 S9.2 | 176.73,16.26 176.73,21.72 U$21.3 169.67,28.78 169.67,39.24 X8.1
MISO
  Top 0.406: U$4.D12 62.74,41.4 67.82,36.32 U$11.15
MISO1
  Top 0.406: U$8.D12 62.74,89.41 67.82,84.33 U$7.15
MOSI
  Top 0.406: U$4.D11 56.9,41.15 56.9,42.42 57.4,42.93 62.48,42.93 69.09,36.32 U$11.14
MOSI1
  Top 0.406: U$8.D11 56.9,89.15 56.9,90.42 57.4,90.93 62.48,90.93 69.09,84.33 U$7.14
N$1
  Top 0.61: X1.1 19.74,11.89 D1.C
N$2  (via drill 0.45)
  Top 0.61: v21.59,10.41 21.45,10.28 D1.A | U$3.P$1 21.59,30.55 v21.59,17.78
  Bottom 0.61: v21.59,10.41 v21.59,17.78 21.59,30.55 U$3.P$1
N$3  (via drill 0.45)
  Top 0.406: 6.73,10.54 7.62,9.65 7.62,7.61 R1.2
  Top 0.61: U$2.7 6.73,10.54 7.62,11.43 7.62,15.24 8.89,16.51 v23.88,16.51 29.09,21.72 U$3.P$4
  Bottom 0.61: U$3.P$4 29.09,21.72 v23.88,16.51
N$4  (via drill 0.45)
  Top 0.61: U$4.D2 46.99,16 45.72,17.27 40.64,17.27 38.61,15.24 v16.26,15.24 | v12.95,10.41 12.83,10.54 U$2.2
  Bottom 0.61: v16.26,15.24 12.95,11.94 v12.95,10.41
N$5  (via drill 0.45)
  Top 0.61: U$3.P$2 U$3.P$3 18.03,21.41 v18.03,17.78 | D2.C 18.4,7 v18.03,7.37
  Bottom 0.61: v18.03,7.37 v18.03,17.78 18.03,21.41 U$3.P$3 U$3.P$2
N$6  (via drill 0.45)
  Top 0.406: LED1.A 66.55,42.89 v66.55,41.91
  Bottom 0.406: v66.55,41.91 66.55,41.15 U$4.D9
N$7
  Top 0.61: D2.A 24.46,5.2 X1.2
N$8
  Top 0.406: LED1.C 68.83,42.71 R2.1
N$9  (via drill 0.45)
  Top 0.406: v53.85,8.13 59.4,2.58 S1.A1 S1.A2 | v53.85,13.21 52.32,14.73 46.74,14.73 45.47,16 U$4.A7
  Bottom 0.406: v53.85,8.13 v53.85,13.21
N$10  (via drill 0.45)
  Top 0.406: 6.73,58.55 7.62,57.66 7.62,55.62 R3.2
  Top 0.61: U$1.7 6.73,58.55 7.62,59.44 7.62,63.25 8.89,64.52 v23.88,64.52 29.09,69.73 U$12.P$4
  Bottom 0.61: U$12.P$4 29.09,69.73 v23.88,64.52
N$11  (via drill 0.45)
  Top 0.61: v21.59,58.42 21.45,58.28 D3.A | U$12.P$1 21.59,78.56 v21.59,65.79
  Bottom 0.61: v21.59,58.42 v21.59,65.79 21.59,78.56 U$12.P$1
N$12  (via drill 0.45)
  Top 0.61: U$8.D2 46.99,64.01 45.72,65.28 40.64,65.28 38.61,63.25 v16.26,63.25 | v12.95,58.42 12.83,58.55 U$1.2
  Bottom 0.61: v16.26,63.25 12.95,59.94 v12.95,58.42
N$13
  Top 0.61: X2.1 19.74,59.9 D3.C
N$14  (via drill 0.45)
  Top 0.61: U$12.P$2 U$12.P$3 18.03,69.41 v18.03,65.79 | D4.C 18.4,55 v18.03,55.37
  Bottom 0.61: v18.03,55.37 v18.03,65.79 18.03,69.41 U$12.P$3 U$12.P$2
N$15
  Top 0.406: U$7.1 64.01,72.39 65.15,71.25 U$6.1
N$16  (via drill 0.45)
  Top 0.406: U$6.4 64.01,67.44 63.25,68.2 v63.25,68.33 | v65.28,76.45 U$7.2
  Bottom 0.406: v63.25,68.33 63.25,74.42 v65.28,76.45
N$17  (via drill 0.45)
  Top 0.406: CRYSTAL1.2 74.68,64.76 C2.2 v76.45,64.77 | v72.9,76.2 U$7.8
  Bottom 0.406: v76.45,64.77 72.9,68.33 v72.9,76.2
N$18
  Top 0.406: R4.2 74.05,71.25 U$6.8
N$19  (via drill 0.45)
  Top 0.406: CRYSTAL1.1 C3.2 64.52,64.77 v63.5,63.75 | U$7.7 71.63,75.18 v70.61,76.2
  Bottom 0.406: v70.61,76.2 70.61,65.79 68.58,63.75 v63.5,63.75
N$20
  Top 0.406: R5.1 LED2.C
N$21
  Top 0.61: D4.A 24.46,53.2 X2.2
N$22
  Top 0.406: LED3.C 68.83,90.71 R6.1
N$23  (via drill 0.45)
  Top 0.406: LED3.A 66.55,90.9 v66.55,89.92
  Bottom 0.406: v66.55,89.92 66.55,89.15 U$8.D9
N$24  (via drill 0.45)
  Top 0.406: v53.85,56.13 59.4,50.58 S2.A1 S2.A2 | v53.85,61.21 52.32,62.74 46.74,62.74 45.47,64.01 U$8.A7
  Bottom 0.406: v53.85,56.13 v53.85,61.21
N$25
  Top 0.61: R8.1 LED6.A
N$26
  Top 0.61: R12.1 LED10.A
N$27
  Top 0.61: R13.1 LED11.A
N$28  (via drill 0.51)
  Top 0.61: LED13.A 115.41,55.98 v115.38,53.15
  Bottom 0.61: v115.38,53.15 R15.1
N$29  (via drill 0.51)
  Top 0.61: v115,45.59 114.97,45.56 LED14.A
  Bottom 0.61: R16.1 117.91,45.59 v115,45.59
N$30
  Top 0.61: LED9.A R11.1
N$31
  Bottom 0.61: U$18.2 84.94,41 85.85,41.91 SOFT_SSR1.3
N$32  (via drill 0.51)
  Top 0.61: v102.04,80.45 LED4.A
  Bottom 0.61: R7.1 v102.04,80.45
N$33
  Bottom 0.61: R7.2 U$13.D10(TX2)
N$34  (via drill 0.51)
  Top 0.61: v102.42,74.42 5V.A
  Bottom 0.61: R10.2 v102.43,74.43 v102.42,74.42
N$35  (via drill 0.51)
  Top 0.61: v97.92,55.12 97.92,38.99 v90.93,32
  Bottom 0.61: X6.11 105.54,56.26 99.12,56.26 97.98,55.12 v97.92,55.12 | v90.93,32 U$18.P
N$36  (via drill 0.51)
  Top 0.61: v88.39,31.75 96.01,39.37 96.01,58.42 98.55,60.96 v98.55,62.61
  Bottom 0.61: X6.6 98.59,62.57 v98.55,62.61 | U$18.S 88.39,16.41 v88.39,31.75
N$37
  Top 0.406: U$11.1 64.01,24.38 65.15,23.24 U$10.1
N$38
  Top 0.61: R22.1 LED8.A
N$39  (via drill 0.45)
  Top 0.406: U$10.4 64.01,19.43 63.25,20.19 v63.25,20.32 | v65.28,28.45 U$11.2
  Bottom 0.406: v63.25,20.32 63.25,26.42 v65.28,28.45
N$40  (via drill 0.45)
  Top 0.406: CRYSTAL.2 74.68,16.75 C9.2 v76.45,16.76 | v72.9,28.19 U$11.8
  Bottom 0.406: v76.45,16.76 72.9,20.32 v72.9,28.19
N$41
  Top 0.406: R24.2 74.05,23.24 U$10.8
N$42  (via drill 0.45)
  Top 0.406: CRYSTAL.1 C10.2 64.52,16.76 v63.5,15.75 | U$11.7 71.63,27.18 v70.61,28.19
  Bottom 0.406: v70.61,28.19 70.61,17.78 68.58,15.75 v63.5,15.75
N$43
  Top 0.61: R18.1 LED15.A
N$44
  Top 0.61: R19.1 LED16.A
N$45  (via drill 0.51)
  Top 0.61: LED17.A 185.26,55.98 v185.23,53.15
  Bottom 0.61: v185.23,53.15 R20.1
N$46  (via drill 0.51)
  Top 0.61: v184.85,45.59 184.81,45.56 LED18.A
  Bottom 0.61: R21.1 187.76,45.59 v184.85,45.59
N$47
  Top 0.61: LED12.A R23.1
N$48
  Bottom 0.61: U$24.2 154.79,41 155.7,41.91 SOFT_SSR3.3
N$49  (via drill 0.51)
  Top 0.61: v171.89,80.45 LED5.A
  Bottom 0.61: R14.1 v171.89,80.45
N$50
  Bottom 0.61: R14.2 U$19.D10(TX2)
N$51  (via drill 0.51)
  Top 0.61: v172.28,74.42 5V1.A
  Bottom 0.61: R17.2 v172.28,74.43 v172.28,74.42
N$52  (via drill 0.51)
  Top 0.61: v167.77,55.12 167.77,38.99 v160.78,32
  Bottom 0.61: X8.11 175.39,56.26 168.97,56.26 167.83,55.12 v167.77,55.12 | v160.78,32 U$24.P
N$53  (via drill 0.51)
  Top 0.61: v158.24,31.75 165.86,39.37 165.86,58.42 168.4,60.96 v168.4,62.61
  Bottom 0.61: X8.6 168.44,62.57 v168.4,62.61 | U$24.S 158.24,16.41 v158.24,31.75
N$61
  Top 0.406: R28.1 LED7.C
SCK
  Top 0.406: U$4.D13 46.48,43.94 62.74,43.94 70.36,36.32 U$11.13
SCK1
  Top 0.406: U$8.D13 46.48,91.95 62.74,91.95 70.36,84.33 U$7.13
SHUTDOWN_IN  (via drill 0.51)
  Top 1.27: v104.71,54.17 104.71,39.56 106.87,37.4 v106.87,37.34
  Bottom 1.27: X6.4 v104.71,54.17 | v106.87,37.34 106.87,29.22 U$15.6
SHUTDOWN_IN1  (via drill 0.51)
  Top 1.27: v174.56,54.17 174.56,39.56 176.72,37.4 v176.72,37.34
  Bottom 1.27: X8.4 v174.56,54.17 | v176.72,37.34 176.72,29.22 U$21.6
SHUTDOWN_IN_A
  Bottom 1.27: U$16.6 143.56,25.4 141.35,25.4 138.81,27.94 132.84,27.94 130.87,25.97 114.49,25.97 112.52,27.94 112.52,29.21 111.25,30.48 U$15.5
SHUTDOWN_IN_A1
  Bottom 1.27: U$22.6 213.41,25.4 211.2,25.4 208.66,27.94 202.69,27.94 200.72,25.97 184.34,25.97 182.37,27.94 182.37,29.21 181.1,30.48 U$21.5
SHUTDOWN_IN_B
  Bottom 1.27: U$17.P 126.05,51.24 130.3,46.99 135.38,46.99 143.64,38.73 U$16.5
SHUTDOWN_IN_B1
  Bottom 1.27: U$23.P 195.9,51.24 200.15,46.99 205.23,46.99 213.49,38.73 U$22.5
SHUTDOWN_OUT
  Bottom 0.61: U$17.S 120.02,40.92 R16.2
  Bottom 1.27: U$17.S 116.73,40.89 X6.9
SHUTDOWN_OUT1
  Bottom 0.61: U$23.S 189.87,40.92 R21.2
  Bottom 1.27: U$23.S 186.58,40.89 X8.9
SW_KILL
  Bottom 0.61: SOFT_SSR.1 96.46,63.31 U$13.D13
SW_KILL1
  Bottom 0.61: SOFT_SSR2.1 166.31,63.31 U$19.D13
SW_KILL_RELAY
  Bottom 0.61: SOFT_SSR.3 88.58,60.77 90.37,58.98 D7.C 96.57,58.98 98.04,60.45 109.98,60.45 109.98,55.88 111.25,54.61 111.25,50.8 112.85,49.2 R15.2 117.28,49.2 120.05,51.98 U$17.2
SW_KILL_RELAY1
  Bottom 0.61: SOFT_SSR2.3 158.43,60.77 160.22,58.98 D10.C 166.42,58.98 167.89,60.45 179.83,60.45 179.83,55.88 181.1,54.61 181.1,50.8 182.7,49.2 R20.2 187.12,49.2 189.9,51.98 U$23.2

## Text on the board
bPlace: IXTN660N04T4 Power Mosfet | IXTN660N04T4 Power Mosfet
tDocu: GPIO | GPIO | 5V | 5V | Georgia Tech HyTech Racing / 2018 FSAE Charger Control Board rev2 / Designed by Chad Hendrix | Georgia Tech HyTech Racing / 2018 FSAE Charger Control Board rev2 / Designed by Chad Hendrix | Designed by Sai and Nathan | HyTech 2018 Load Bank Mosfet Driver Board rev2 | IMD Relay | BMS Relay | IMD Relay | BMS Relay | IMD | BMS | IMD | BMS | LED B | LED B | LED A | LED A | LED C | LED D | LED C | LED D | Designed by Sai and Nathan | HyTech 2018 Load Bank Mosfet Driver Board rev2